# Altium PCB PCB1.PcbDoc
Units mm, origin at the board's own origin, x right, y up, seen from the top; angles counter-clockwise.
Board outline 34.8 x 16.26 mm, 2 copper layers (Top Layer, Bottom Layer); 18 components, 14 nets, 67 pads, 3 vias.
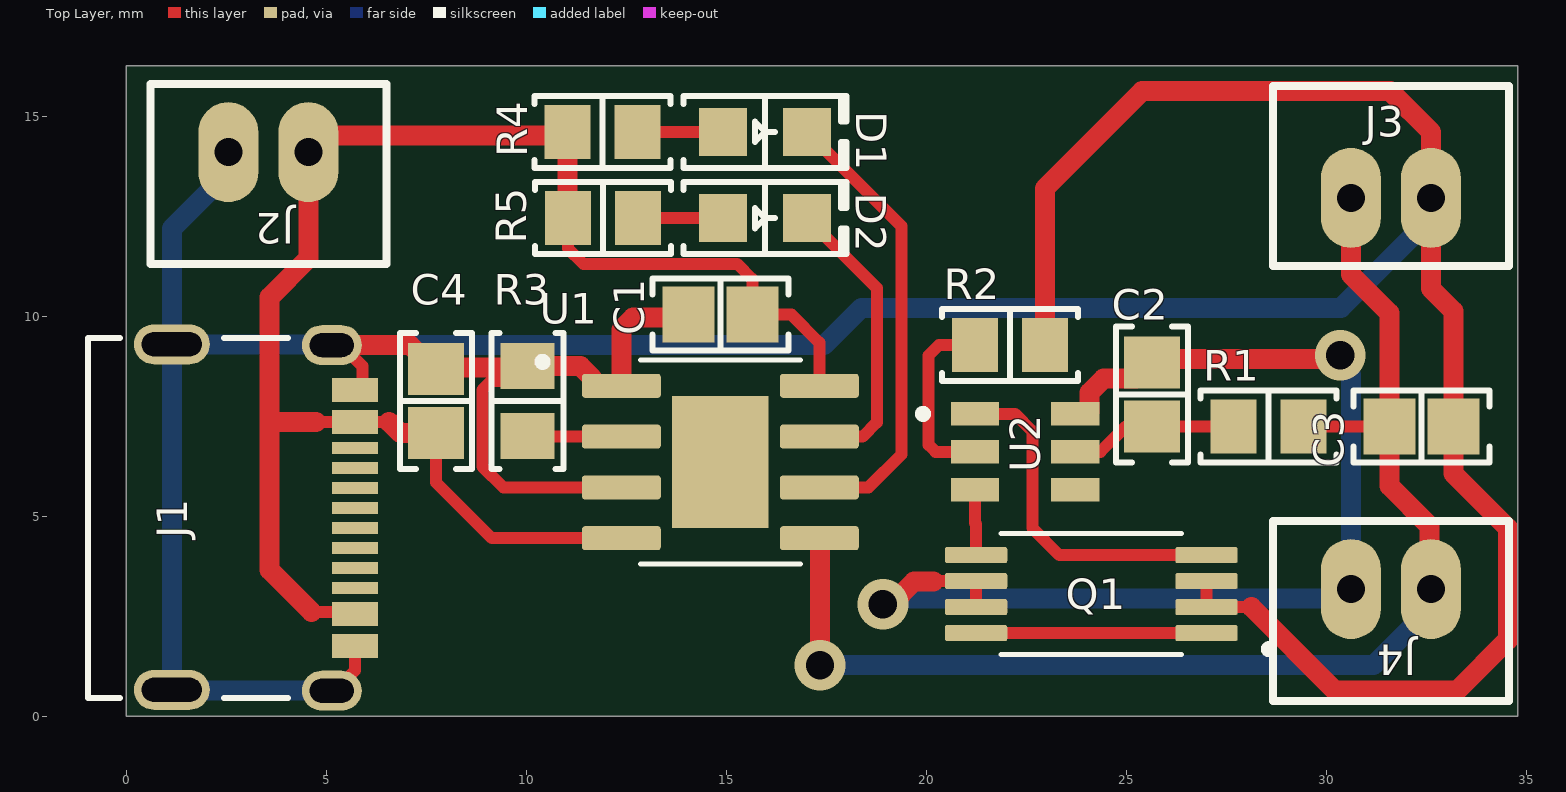
[diagram p0: Top Layer view]
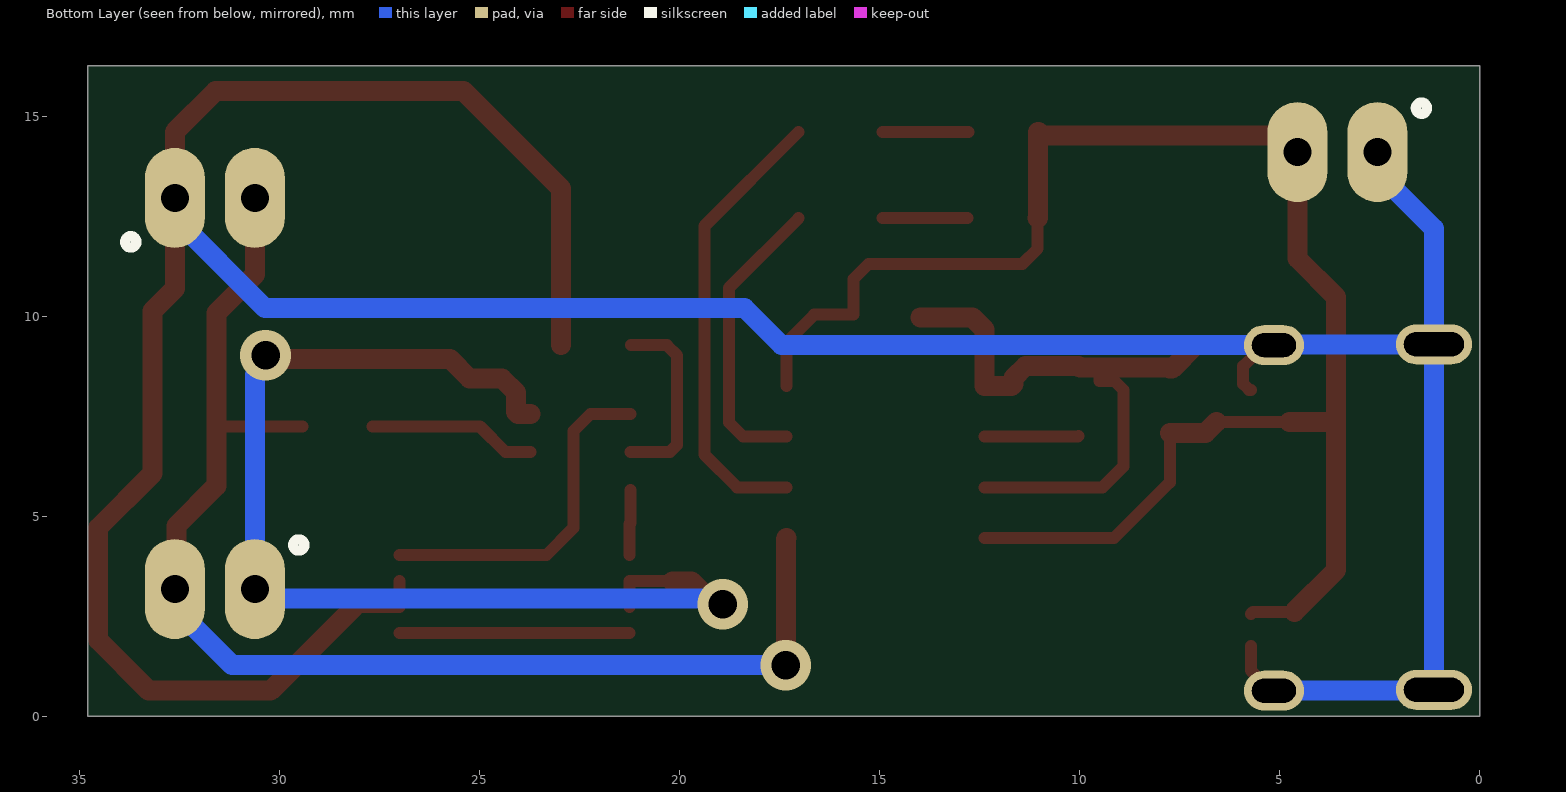
[diagram p1: Bottom Layer view, seen from below]
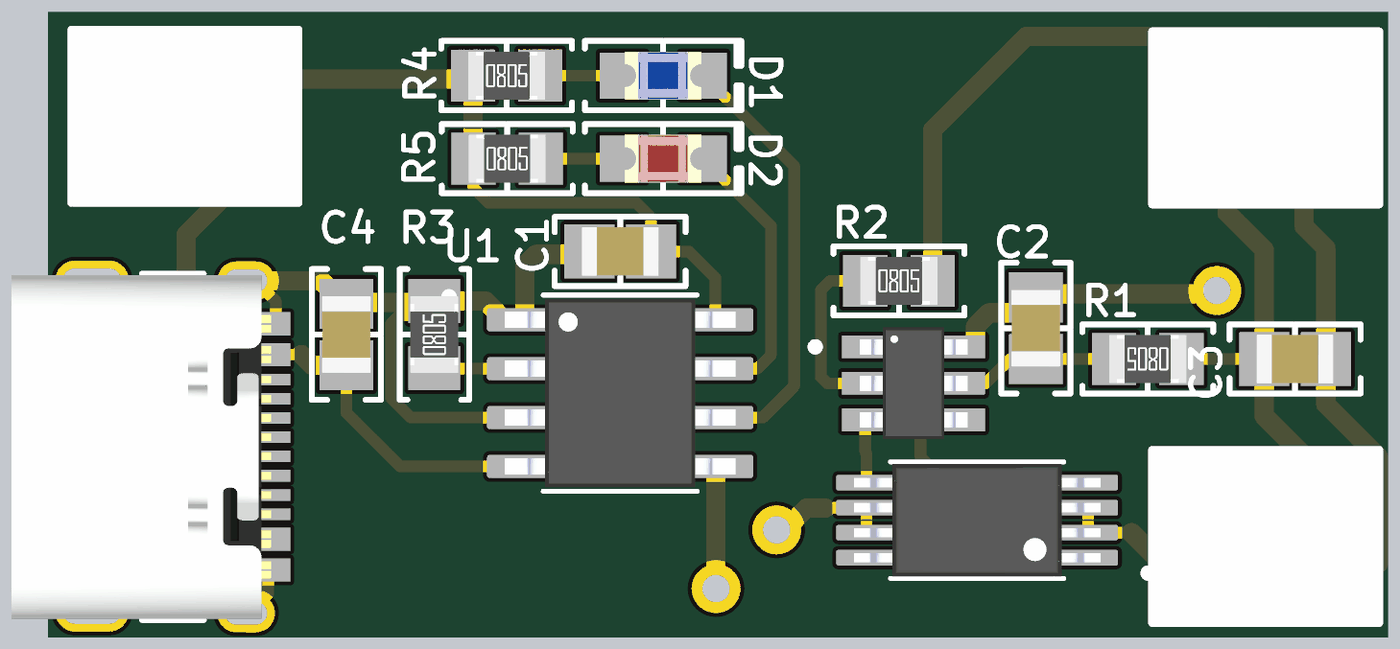
[diagram p2: 3D render of the assembled board from above, using the file's embedded part models]

## Layer stack, top to bottom
Top Solder: solder mask 0.0102, Solder Resist, Dk 3.5
Top Layer: signal copper 0.0356
Dielectric 1: dielectric 0.32, FR-4, Dk 4.8
Bottom Layer: signal copper 0.0356
Bottom Solder: solder mask 0.0102, Solder Resist, Dk 3.5

## Board outline
0,0 34.798,0 34.798,16.256 0,16.256

## Design rules (kind name [scope] priority, off if disabled: settings)
Clearance [All] p1: gap=0.3 ignorepadtopadclearanceinfootprint=TRUE
PolygonConnect [All] p1: connectstyle=Relief reliefconductorwidth=0.254 reliefentries=4 polygonreliefangle="90 Angle" airgapwidth=0.254
RoutingVias [All] p1: holewidth=0.711 width=1.27 viastyle="Through Hole" minholewidth=0.711 minwidth=1.27 maxholewidth=0.711 maxwidth=1.27
SolderMaskExpansion [All] p1: expansion=0.102 istentingtop=FALSE
Width [All] p1: maxlimit=1 minlimit=0.3 preferedwidth=0.5
30 further rules are at their usual default settings.

## Components (designator, comment, footprint, x,y, rotation, side; value= is the part's Value field where it differs from the comment)
C1 "0.1 µF" "CAP 0805_2012" 14.859,10.033 r0 top
C2 "0.1 µF" "CAP 0805_2012" 25.654,8.039 r270 top
C3 "0.1 µF" "CAP 0805_2012" 32.385,7.239 r180 top
C4 "0.1 µF" "CAP 0805_2012" 7.747,7.874 r270 top
D1 "Blue" "LED 0805_2012 BLUE" 15.974,14.605 r0 top
D2 "Red" "LED 0805_2012 RED" 15.974,12.446 r0 top
J1 "UJ20-C-H-G-SMT-2-P16-TR" "Same Sky UJ20-C-H-G-SMT-2-P16-TR" 1.143,4.953 r270 top
J2 "B2B-PH-K-S(LF)(SN)" "JST B2B-PH-K" 3.556,14.097 r0 top
J3 "B2B-PH-K-S(LF)(SN)" "JST B2B-PH-K" 31.623,12.954 r180 top
J4 "B2B-PH-K-S(LF)(SN)" "JST B2B-PH-K" 31.623,3.175 r0 top
Q1 "FS8205A" SOP65P640X120-8N 24.13,3.048 r180 top
R1 "100 Ohms" "RES 0805_2012" 28.561,7.239 r180 top
R2 "1 kOhms" "RES 0805_2012" 22.098,9.271 r0 top
R3 "1.2 kOhms" "RES 0805_2012" 10.033,7.874 r90 top
R4 "1 kOhms" "RES 0805_2012" 11.91,14.605 r0 top
R5 "1 kOhms" "RES 0805_2012" 11.924,12.446 r0 top
U1 "TP4056" SOP127P600X175-9N 14.859,6.35 r0 top
U2 "DW01A" SOT95P280X145-6N 22.479,6.604 r0 top

## Footprints (in the part's own frame and the unit in brackets; to place one, negate y for a bottom-side part, rotate by r counter-clockwise, add the part's x,y. Pads: shape width x height; smd on the part's side, far side on the other; paste and mask are expansions set on the pad)
"CAP 0805_2012" [mm] "Chip Capacitor, 2-Leads, Body 2.00x1.20mm, IPC Medium Density"
  rect 1.3x1.4 smd: 1(-0.8,0) 2(0.8,0)
  silkscreen extent -1.7,-0.9 1.7,0.9, body extent -1,-0.64 1,0.64, height 1.26
"JST B2B-PH-K" [mm]
  oval 1.5x2.5 hole 0.7: 1(-1,0) 2(1,0)
  silkscreen extent -2.95,-2.8 2.95,1.7, body extent -2.95,-2.8 2.95,1.7, height 6
"LED 0805_2012 BLUE" [mm] "Chip Diode, 2-Leads, Body 2.00x1.25mm, IPC Medium Density"
  rect 1.2x1.2 smd: 1(-1.05,0) 2(1.05,0)
  silkscreen extent -2.03,-0.9 2.03,0.9, body extent -1,-0.62 1,0.63, height 0.9
"LED 0805_2012 RED" [mm] "Chip Diode, 2-Leads, Body 2.00x1.25mm, IPC Medium Density"
  rect 1.2x1.2 smd: 1(-1.05,0) 2(1.05,0)
  silkscreen extent -2.03,-0.9 2.03,0.9, body extent -1,-0.62 1,0.63, height 0.9
"RES 0805_2012" [mm] "Chip Resistor, 2-Leads, Body 2.00x1.25mm, IPC Medium Density"
  rect 1.15x1.35 smd: 1(-0.875,0) 2(0.875,0)
  silkscreen extent -1.7,-0.9 1.7,0.9, body extent -1,-0.62 1,0.63, height 0.6
"Same Sky UJ20-C-H-G-SMT-2-P16-TR" [mm] "Type C, USB 2.0, 480 Mbps, 48 Vdc, 5 A, Horizontal, Surface Mount Anchor Pins Mounting Style, Surface Mount Contact Pin Type, Gold Plated 3 µin, 16 Pins, USB Receptacle"
  rect 0.6x1.15 smd: A1B12(-3.2,4.575) A4B9(-2.4,4.575) B1A12(3.2,4.575) B4A9(2.4,4.575)
  rect 0.3x1.15 smd: A5(-1.25,4.575) A6(-0.25,4.575) A7(0.25,4.575) A8(1.25,4.575) B5(1.75,4.575) B6(0.75,4.575) B7(-0.75,4.575) B8(-1.75,4.575)
  oval 1x1.9 hole 0.6 slot 1.5 at 90 deg: S(-4.34,0) S(4.3,0)
  oval 1x1.5 hole 0.6 slot 1.1 at 90 deg: S(-4.32,4) S(4.32,4)
  silkscreen extent -4.5,-2.1 4.5,2.9, body extent -4.47,-2.1 4.47,4.65, height 3.26
SOP65P640X120-8N [mm]
  rrect25% 1.56x0.4 smd: 1(-2.88,0.975) 2(-2.88,0.325) 3(-2.88,-0.325) 4(-2.88,-0.975) 5(2.88,-0.975) 6(2.88,-0.325) 7(2.88,0.325) 8(2.88,0.975)
  silkscreen extent -4.54,-1.52 2.25,1.52, body extent -3.2,-1.47 3.2,1.47, height 1.2
SOP127P600X175-9N [mm]
  rrect25% 1.97x0.6 smd: 1(-2.475,1.905) 2(-2.475,0.635) 3(-2.475,-0.635) 4(-2.475,-1.905) 5(2.475,-1.905) 6(2.475,-0.635) 7(2.475,0.635) 8(2.475,1.905)
  rect 2.413x3.302 smd paste-3: 9(0,0)
  silkscreen extent -4.54,-2.55 2,2.6, body extent -3,-2.45 3,2.45, height 1.75
SOT95P280X145-6N [mm]
  rect 1.21x0.59 smd: 1(-1.255,0.95) 2(-1.255,0) 3(-1.255,-0.95) 4(1.255,-0.95) 5(1.255,0) 6(1.255,0.95)
  silkscreen extent -2.65,0.85 -2.46,1.05, body extent -1.4,-1.45 1.4,1.45, height 1.45

## Part data
C1 C2 C4: library part CC0805MRX7R9BB104, "CAP CER 0.1UF 50V X7R 0805", Device Package="0805 (2012 Metric)", manufacturer=Yageo, Operating Temperature="-55°C ~ 125°C", Supplier Part Number 1=311-4351-1-ND, Temperature Coefficient=X7R, Tolerance=±20%, Voltage - Rated=50V, Applications="General Purpose", Capacitance="0.1 µF", componentlink1description=Datasheet, componentlink1url=https://www.yageo.com/upload/media/product/productsearch/datasheet/mlcc/UPY-GPHC_X7R_6.3V-to-50V_18.pdf, componentlink2description="DigiKey Link", componentlink2url=https://www.digikey.com/en/products/detail/yageo/CC0805MRX7R9BB104/5884281, lastupdated="4/6/2026 7:33:19 PM", Lifecycle Status=Active, Minimum Order=1, Mounting Type="Surface Mount, MLCC", Package / Case="0805 (2012 Metric)", packaging=TapeAndReel, Part Number=CC0805MRX7R9BB104, Part Status=Active, partid=2475, price=0.01, series=CC, Size / Dimension="0.079\" L x 0.049\" W (2.00mm x 1.25mm)", Supplier 1=DigiKey, Thickness (Max)="0.037\" (0.95mm)"
C3: library part CC0805MRX7R9BB104, "CAP CER 0.1UF 50V X7R 0805", Capacitance=10uF, Device Package="0805 (2012 Metric)", manufacturer=Yageo, Operating Temperature="-55°C ~ 125°C", Supplier Part Number 1=311-4351-1-ND, Temperature Coefficient=X7R, Tolerance=±20%, Voltage - Rated=50V, Applications="General Purpose", componentlink1description=Datasheet, componentlink1url=https://www.yageo.com/upload/media/product/productsearch/datasheet/mlcc/UPY-GPHC_X7R_6.3V-to-50V_18.pdf, componentlink2description="DigiKey Link", componentlink2url=https://www.digikey.com/en/products/detail/yageo/CC0805MRX7R9BB104/5884281, lastupdated="4/6/2026 7:33:19 PM", Lifecycle Status=Active, Minimum Order=1, Mounting Type="Surface Mount, MLCC", Package / Case="0805 (2012 Metric)", packaging=TapeAndReel, Part Number=CC0805MRX7R9BB104, Part Status=Active, partid=2475, price=0.01, series=CC, Size / Dimension="0.079\" L x 0.049\" W (2.00mm x 1.25mm)", Supplier 1=DigiKey, Thickness (Max)="0.037\" (0.95mm)"
D1: library part SML-LX0805USBC-TR, "LED BLUE CLEAR SMD", Current - Test=20mA, Device Package="0805 (2012 Metric)", Lens Color=Colorless, manufacturer="Lumex Opto/Components Inc.", Millicandela Rating=25mcd, Supplier Part Number 1=67-1638-1-ND, Voltage - Forward (Vf) (Typ)=3.5V, Color=Blue, componentlink1description=Datasheet, componentlink1url=//media.digikey.com/pdf/Data%20Sheets/Lumex%20PDFs/SML-LX0805USBC-TR.pdf, componentlink2description="DigiKey Link", componentlink2url=https://www.digikey.com/en/products/detail/lumex-opto-components-inc/SML-LX0805USBC-TR/408124, Configuration=Standard, lastupdated="4/5/2026 8:35:18 PM", Lens Size="1.40mm x 1.25mm", Lens Style="Rectangle with Flat Top", Lens Transparency=Clear, Lifecycle Status=Active, Minimum Order=1, Mounting Type="Surface Mount", Package / Case="0805 (2012 Metric)", packaging=TapeAndReel, Part Number=SML-LX0805USBC-TR, Part Status=Active, partid=764, price=0.59, series=-, Size / Dimension="2.00mm L x 1.25mm W", Supplier 1=DigiKey, Viewing Angle=140°, Wavelength - Peak=470nm
D2: library part LTST-C170KAKT, "LED RED CLEAR SMD", Current - Test=20mA, Device Package="0805 (2012 Metric)", Lens Color=Colorless, manufacturer="Lite-On Inc.", Millicandela Rating=54mcd, Supplier Part Number 1=160-1412-1-ND, Voltage - Forward (Vf) (Typ)=2V, Color=Red, componentlink1description=Datasheet, componentlink1url=http://optoelectronics.liteon.com/upload/download/DS-22-99-0182/LTST-C170KAKT.pdf, componentlink2description="DigiKey Link", componentlink2url=http://digikey.com/product-detail/en/lite-on-inc/LTST-C170KAKT/160-1412-1-ND/386772, Configuration=Standard, Height (Max)=1.10mm, lastupdated="4/5/2026 8:38:27 PM", Lens Size="1.40mm x 1.25mm", Lens Style="Rectangle with Flat Top", Lens Transparency=Clear, Lifecycle Status=Active, Minimum Order=1, Mounting Type="Surface Mount", Package / Case="0805 (2012 Metric)", packaging=TapeAndReel, Part Number=LTST-C170KAKT, Part Status=Active, partid=305, price=0.07, series=-, Size / Dimension="2.00mm L x 1.25mm W", Supplier 1=DigiKey, Viewing Angle=130°, Wavelength - Dominant=615nm, Wavelength - Peak=621nm
J1: "CONN RCPT USB 2.0 TYPE C SMD RA", Current Rating (Amps)="0.25A, 1.25A, 5A", manufacturer="Same Sky (Formerly CUI Devices)", Operating Temperature="-25°C ~ 85°C", Supplier Part Number 1=2223-UJ20-C-H-G-SMT-2-P16-TRCT-ND, componentlink1description=Datasheet, componentlink1url=https://www.sameskydevices.com/product/resource/uj20-c-h-g-smt-2-p16-tr.pdf, componentlink2description="DigiKey Link", componentlink2url=https://www.digikey.com/en/products/detail/same-sky-formerly-cui-devices/UJ20-C-H-G-SMT-2-P16-TR/24818577, Connector Type="USB-C (USB TYPE-C)", Features="3.0µ\" Finish Thickness", Gender=Receptacle, lastupdated="2/6/2026 9:26:35 AM", Lifecycle Status=Active, Mating Cycles=10000, Minimum Order=1, Mounting Feature=Horizontal, Mounting Type="Surface Mount, Right Angle; Through Hole", Number of Contacts="24 (16+8 Dummy)", Number of Ports=1, packaging=TapeAndReel, Part Number=UJ20-C-H-G-SMT-2-P16-TR, price=0.49, series=UJ20, Shielding=Shielded, Specifications="USB 2.0", Supplier 1=DigiKey, Termination=Solder
J2 J3 J4: "CONN HEADER VERT 2POS 2MM", Current Rating (Amps)=2A, Insulation Color=Natural, manufacturer="JST Sales America Inc.", Material Flammability Rating="UL94 V-0", Operating Temperature="-25°C ~ 85°C", Supplier Part Number 1=455-1704-ND, Voltage Rating=100V, componentlink1description=Datasheet, componentlink1url=http://www.jst-mfg.com/product/pdf/eng/ePH.pdf, componentlink2description="DigiKey Link", componentlink2url=http://digikey.com/product-detail/en/jst-sales-america-inc/B2B-PH-K-S-LF-SN/455-1704-ND/926611, Connector Type=Header, Contact Finish - Mating=Tin, Contact Finish - Post=Tin, Contact Length - Mating="0.130\" (3.30mm)", Contact Length - Post="0.134\" (3.40mm)", Contact Material=Brass, Contact Shape=Square, Contact Type="Male Pin", Fastening Type="Detent Lock", Insulation Height="0.236\" (6.00mm)", Insulation Material="Polyamide (PA66), Nylon 6/6", lastupdated="1/3/2020 11:40:58 PM", Lifecycle Status=Active, Minimum Order=1, Mounting Type="Through Hole", Number of Positions=2, Number of Positions Loaded=All, Number of Rows=1, Overall Contact Length="0.333\" (8.45mm)", packaging=Bulk, Part Number=B2B-PH-K-S(LF)(SN), Part Status=Active, partid=11, Pitch - Mating="0.079\" (2.00mm)", price=0.17, series=PH, Shrouding="Shrouded - 4 Wall", Style="Board to Cable/Wire", Supplier 1=DigiKey, Termination="Press-Fit, Solder"
Q1: Package=Package, Check_prices=https://www.snapeda.com/parts/FS8205A/Fortune+Semiconductor/view-part/?ref=eda, MF="Fortune Semiconductor", MP=FS8205A, SnapEDA_Link=https://www.snapeda.com/parts/FS8205A/Fortune+Semiconductor/view-part/?ref=snap
R1 R3: library part RNCS0805BKE1K00, "RES 1K OHM 0.1% 1/10W 0805", Device Package="0805 (2012 Metric)", manufacturer="Stackpole Electronics Inc", Operating Temperature="-55°C ~ 155°C", Power (Watts)="0.1W, 1/10W", Ratings=AEC-Q200, Resistance="1 kOhms", Supplier Device Package=0805, Supplier Part Number 1=RNCS0805BKE1K00CT-ND, Temperature Coefficient=±25ppm/°C, Tolerance=±0.1%, componentlink1description=Datasheet, componentlink1url=https://www.seielect.com/catalog/sei-rncs_rnch.pdf, componentlink2description="DigiKey Link", componentlink2url=https://www.digikey.com/en/products/detail/stackpole-electronics-inc/RNCS0805BKE1K00/1800073, Composition="Thin Film", Features="Anti-Corrosive, Automotive AEC-Q200, Moisture Resistant", Height - Seated (Max)="0.026\" (0.65mm)", lastupdated="4/5/2026 8:11:26 PM", Lifecycle Status=Active, Minimum Order=1, Number of Terminations=2, Package / Case="0805 (2012 Metric)", packaging=TapeAndReel, Part Number=RNCS0805BKE1K00, Part Status=Active, partid=27715, price=0.08, series=RNCS, Size / Dimension="0.079\" L x 0.049\" W (2.00mm x 1.25mm)", Supplier 1=DigiKey
R2 R4 R5: library part RNCS0805BKE1K00, "RES 1K OHM 0.1% 1/10W 0805", Device Package="0805 (2012 Metric)", manufacturer="Stackpole Electronics Inc", Operating Temperature="-55°C ~ 155°C", Power (Watts)="0.1W, 1/10W", Ratings=AEC-Q200, Supplier Device Package=0805, Supplier Part Number 1=RNCS0805BKE1K00CT-ND, Temperature Coefficient=±25ppm/°C, Tolerance=±0.1%, componentlink1description=Datasheet, componentlink1url=https://www.seielect.com/catalog/sei-rncs_rnch.pdf, componentlink2description="DigiKey Link", componentlink2url=https://www.digikey.com/en/products/detail/stackpole-electronics-inc/RNCS0805BKE1K00/1800073, Composition="Thin Film", Features="Anti-Corrosive, Automotive AEC-Q200, Moisture Resistant", Height - Seated (Max)="0.026\" (0.65mm)", lastupdated="4/5/2026 8:11:26 PM", Lifecycle Status=Active, Minimum Order=1, Number of Terminations=2, Package / Case="0805 (2012 Metric)", packaging=TapeAndReel, Part Number=RNCS0805BKE1K00, Part Status=Active, partid=27715, price=0.08, Resistance="1 kOhms", series=RNCS, Size / Dimension="0.079\" L x 0.049\" W (2.00mm x 1.25mm)", Supplier 1=DigiKey
U1: "Complete single cell Li-Ion battery with a constant current / constant voltage linear charger", Package=Package, Availability="Not in stock", Check_prices=https://www.snapeda.com/parts/TP4056/NanJing+Top+Power+ASIC+Corp./view-part/?ref=eda, MF="NanJing Top Power ASIC Corp.", MP=TP4056, price=None, SnapEDA_Link=https://www.snapeda.com/parts/TP4056/NanJing+Top+Power+ASIC+Corp./view-part/?ref=snap
U2: "One Cell Lithium-ion/Polymer Battery Protection IC", Package="SOT-23-6 Fortune Semiconductor", Check_prices=https://www.snapeda.com/parts/DW01A/Fortune+Semiconductor/view-part/?ref=eda, MF="Fortune Semiconductor", MP=DW01A, SnapEDA_Link=https://www.snapeda.com/parts/DW01A/Fortune+Semiconductor/view-part/?ref=snap

## Via types
v1: diameter 1.27, hole 0.711, Top Layer to Bottom Layer, 3 vias

## Nets (pads, with @x,y where several pads share a name; then routed paths per layer and width w, separated by ;. In a path a pad name is that pad's centre, name@x,y a point inside that pad or via, vN(x,y) a via of type N, cw(c..) or ccw(c..) an arc to the next point about the centre after c; other vN are vias at no path point)
+5: C1.2 C4.2 J1.A4B9 J1.B4A9 J2.2 R4.1 R5.1 U1.4 U1.8 | length 42.6
  Top Layer w0.3: 4.636,2.603 5.668,2.603 J1.B4A9 ; 4.752,7.353 J1.A4B9 6.579,7.353 ; C4.2 7.747,5.842 9.144,4.445 U1.4 ; R5.1 11.049,11.684 11.43,11.303 15.278,11.303 15.659,10.922 C1.2 16.637,10.033 17.334,9.336 U1.8
  Top Layer w0.5: 4.636,2.603 3.589,3.65 3.589,7.239 ; 4.752,7.353 3.703,7.353 3.589,7.239 ; 6.579,7.353 6.858,7.074 C4.2 ; R4.1 11.042,14.598 R4.1@11.042,14.519 ; R5.1 11.042,12.453 R4.1@11.042,14.519 ; 3.589,7.239 3.589,10.472 4.556,11.439 J2.2 4.978,14.519 R4.1@11.042,14.519
B+: C3.2 J3.2 J4.2 R1.1 U1.5 | length 32.3
  Top Layer w0.3: R1.1 C3.2
  Top Layer w0.5: U1.5 17.348,4.431 v1(17.348,1.27) ; J3.2 30.623,11.033 31.585,10.071 C3.2 31.585,5.753 32.582,4.756 32.582,3.216 J4.2
  Bottom Layer w0.5: v1(17.348,1.27) 31.189,1.27 32.623,2.704 J4.2
B-: C2.1 J4.1 Q1.6 Q1.7 U2.6 | length 28.5
  Top Layer w0.3: 20.182,3.373 Q1.6 Q1.7
  Top Layer w0.5: v1(18.923,2.794) 19.131,2.794 19.7,3.362 20.182,3.362 ; U2.6@23.724,7.554 U2.6 24.044,7.554 24.089,7.599 24.089,8.087 24.441,8.439 25.254,8.439 25.743,8.928 30.264,8.928 v1(30.353,9.017)
  Bottom Layer w0.5: v1(18.923,2.794) 19.07,2.941 30.389,2.941 J4.1 30.623,8.539 30.353,8.809 v1(30.353,9.017)
CHRG: D2.2 U1.7 | length 7.4
  Top Layer w0.3: D2.2 18.771,10.699 18.771,7.341 18.415,6.985 U1.7
GND: C1.1 C3.1 C4.1 J1.A1B12 J1.B1A12 J1.S J2.1 J3.1 Q1.2 Q1.3 R2.2 R3.2 U1.1 U1.3 | length 109.9
  Top Layer w0.3: J1.S@5.143,0.633 5.219,0.633 5.718,1.132 J1.B1A12 ; J1.S@5.387,9.273 5.912,8.747 5.912,8.303 5.762,8.153 J1.A1B12 ; R3.2@9.511,8.711 9.511,8.374 9.508,8.371 9.125,8.371 8.908,8.154 8.908,6.238 9.431,5.715 U1.3 ; C1.1@13.986,9.96 C1.1 ; Q1.3 Q1.2 28.138,2.723
  Top Layer w0.5: J1.S@5.143,9.273 5.387,9.273 7.098,9.273 7.689,8.682 7.755,8.682 7.784,8.711 9.511,8.711 9.996,8.711 R3.2 11.356,8.749 11.649,8.456 11.649,8.305 11.699,8.255 U1.1 12.384,9.667 12.677,9.96 C1.1@13.986,9.96 ; R2.2 22.973,13.194 25.4,15.621 31.607,15.621 32.623,14.605 32.623,10.684 33.185,10.122 33.185,6.058 34.544,4.699 34.544,1.905 33.274,0.635 30.226,0.635 28.138,2.723
  Bottom Layer w0.5: J2.1 2.556,13.597 1.143,12.184 J1.S@1.143,9.293 ; J1.S@5.143,0.633 5.133,0.643 1.153,0.643 1.143,0.653 J1.S@1.143,9.293 ; J3.1 32.623,12.454 30.371,10.202 18.381,10.202 17.452,9.273 5.143,9.273 5.133,9.283 1.153,9.283 J1.S@1.143,9.293
NetC2_2: C2.2 R1.2 U2.5 | length 4.2
  Top Layer w0.3: U2.5 24.359,6.604 24.994,7.239 C2.2 R1.2
NetD1_1: D1.1 R4.2 | length 2.1
  Top Layer w0.3: R4.2 D1.1
NetD2_1: D2.1 R5.2 | length 2.1
  Top Layer w0.3: R5.2 D2.1
NetQ1_1: Q1.1 Q1.8 | length 5.8
  Top Layer w0.3: Q1.8 Q1.1
NetR2_1: R2.1 U2.2 | length 4.7
  Top Layer w0.3: R2.1 20.32,9.271 20.066,9.017 20.066,6.78 20.242,6.604 U2.2
NetR3_1: R3.1 U1.2 | length 2.4
  Top Layer w0.3: R3.1 10.047,6.985 U1.2
OC: Q1.5 U2.3 | length 1.6
  Top Layer w0.3: U2.3 21.224,4.827 21.25,4.801 Q1.5
OD: Q1.4 U2.1 | length 8.7
  Top Layer w0.3: U2.1 22.225,7.554 22.657,7.122 22.657,4.699 23.333,4.023 Q1.4
STD: D1.2 U1.6 | length 11.4
  Top Layer w0.3: D1.2 19.38,12.249 19.38,6.533 18.562,5.715 U1.6
pads on no net: J1.A5 J1.A6 J1.A7 J1.A8 J1.B5 J1.B6 J1.B7 J1.B8 U1.9 U2.4